# Altium PCB Radar_FMCW.PcbDoc
Units mil, origin at the board's own origin, x right, y up, seen from the top; angles counter-clockwise.
Board outline 4724.41 x 4724.41 mil, 4 copper layers (Top Layer 1, Top Layer, Bottom Layer, Bottom Layer 1), stack 19.964 mil thick; 32 components, 22 nets, 309 pads, 67 vias.
Unrouted connection lines stored in the file: 3.
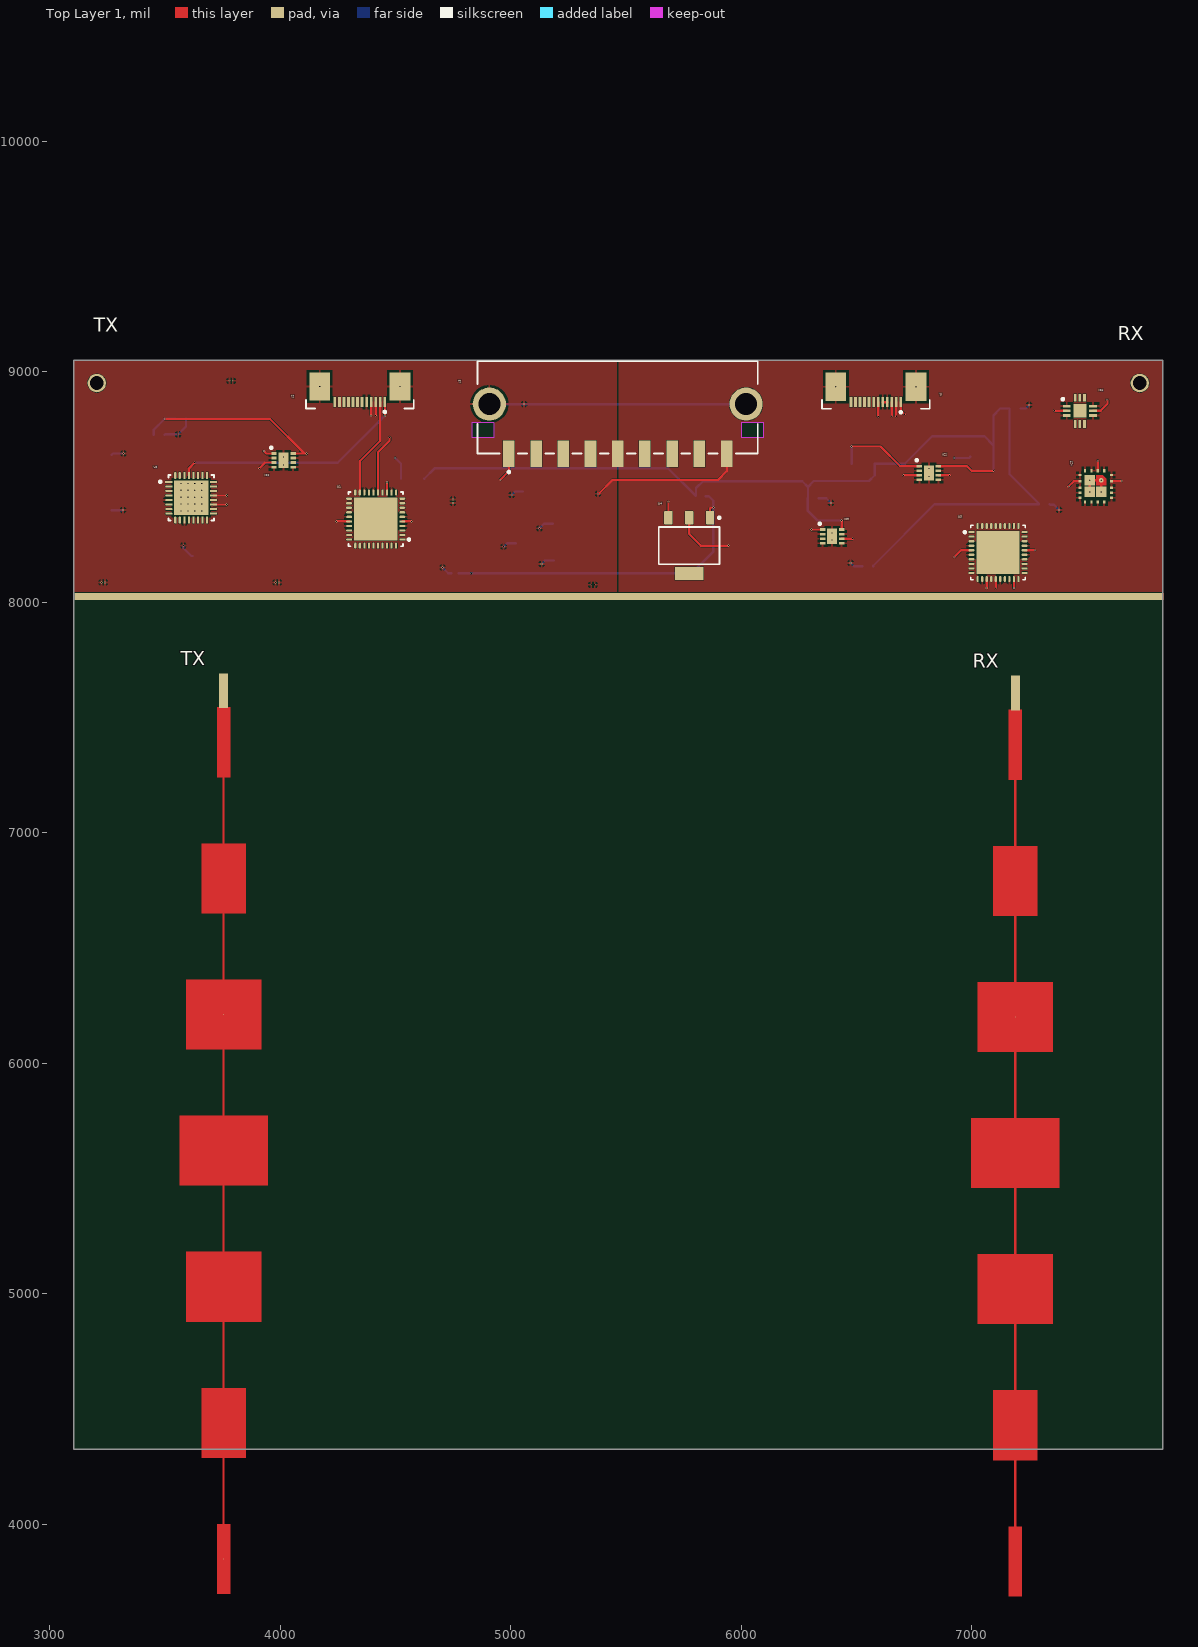
[diagram p0: Top Layer 1 view]
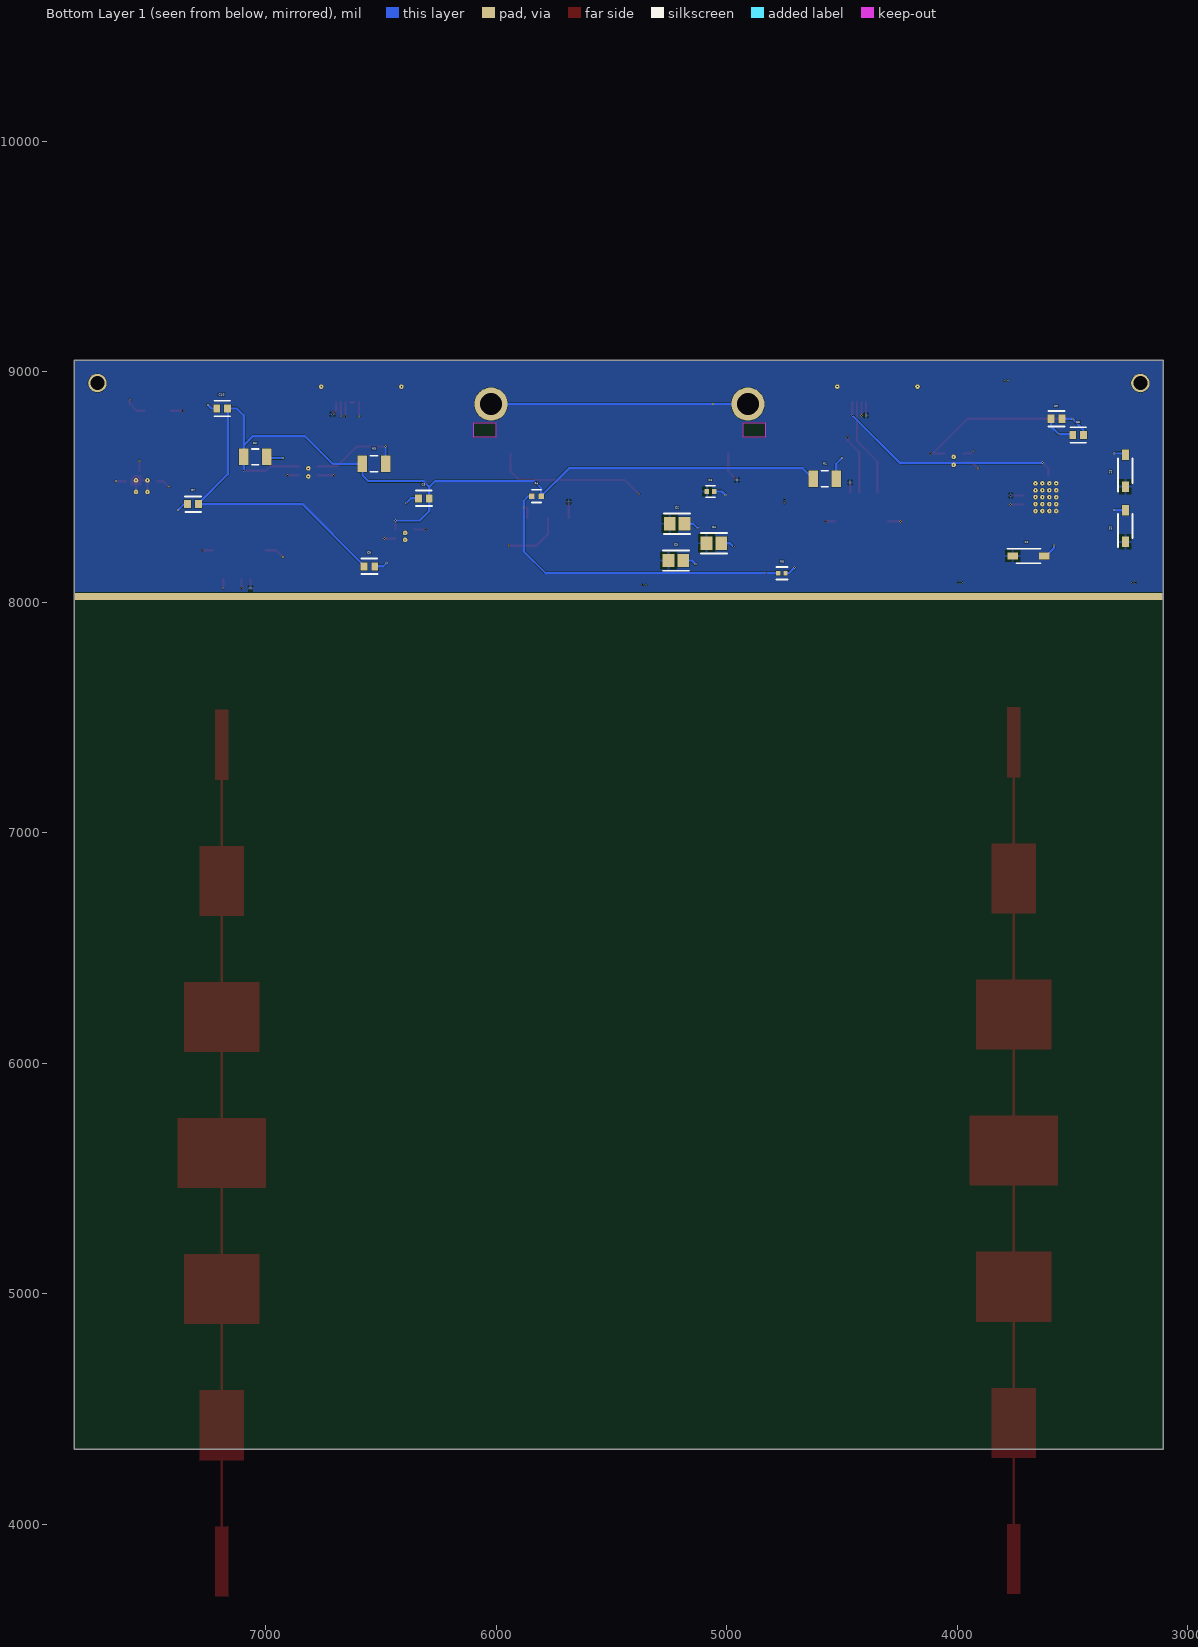
[diagram p1: Bottom Layer 1 view, seen from below]
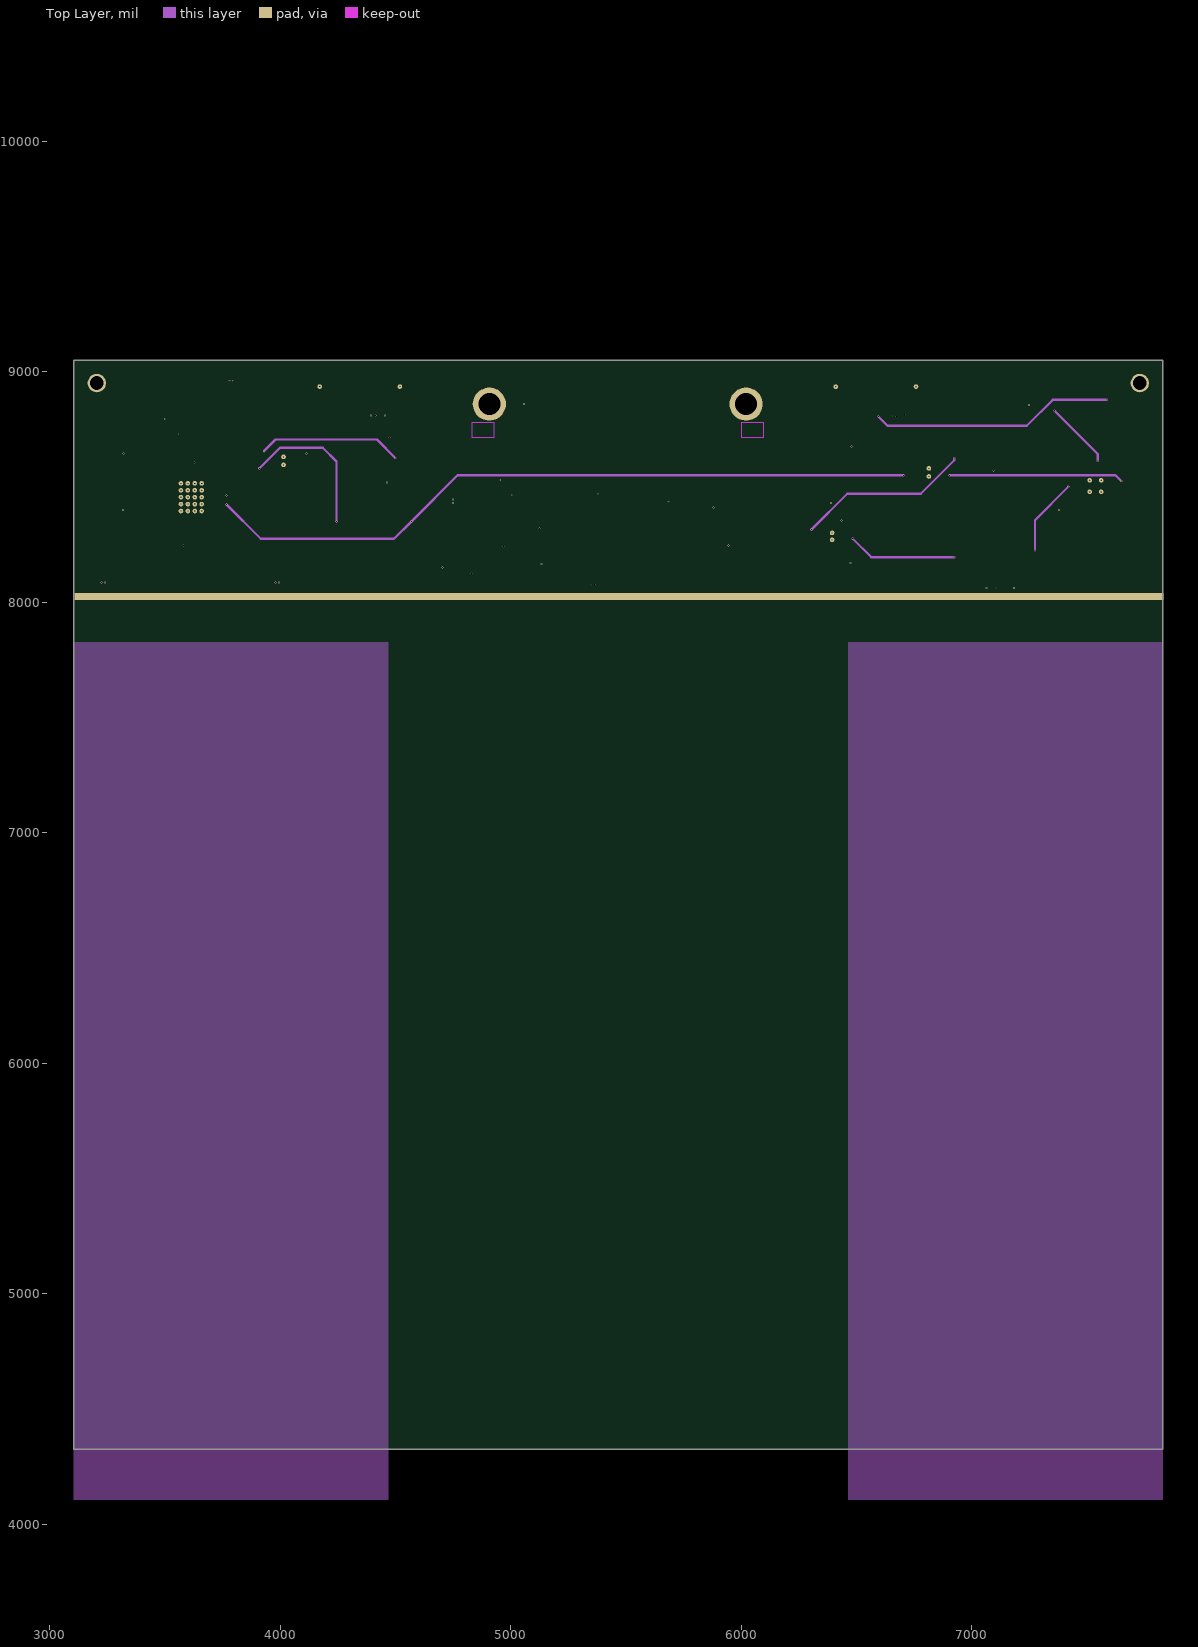
[diagram p2: Top Layer]
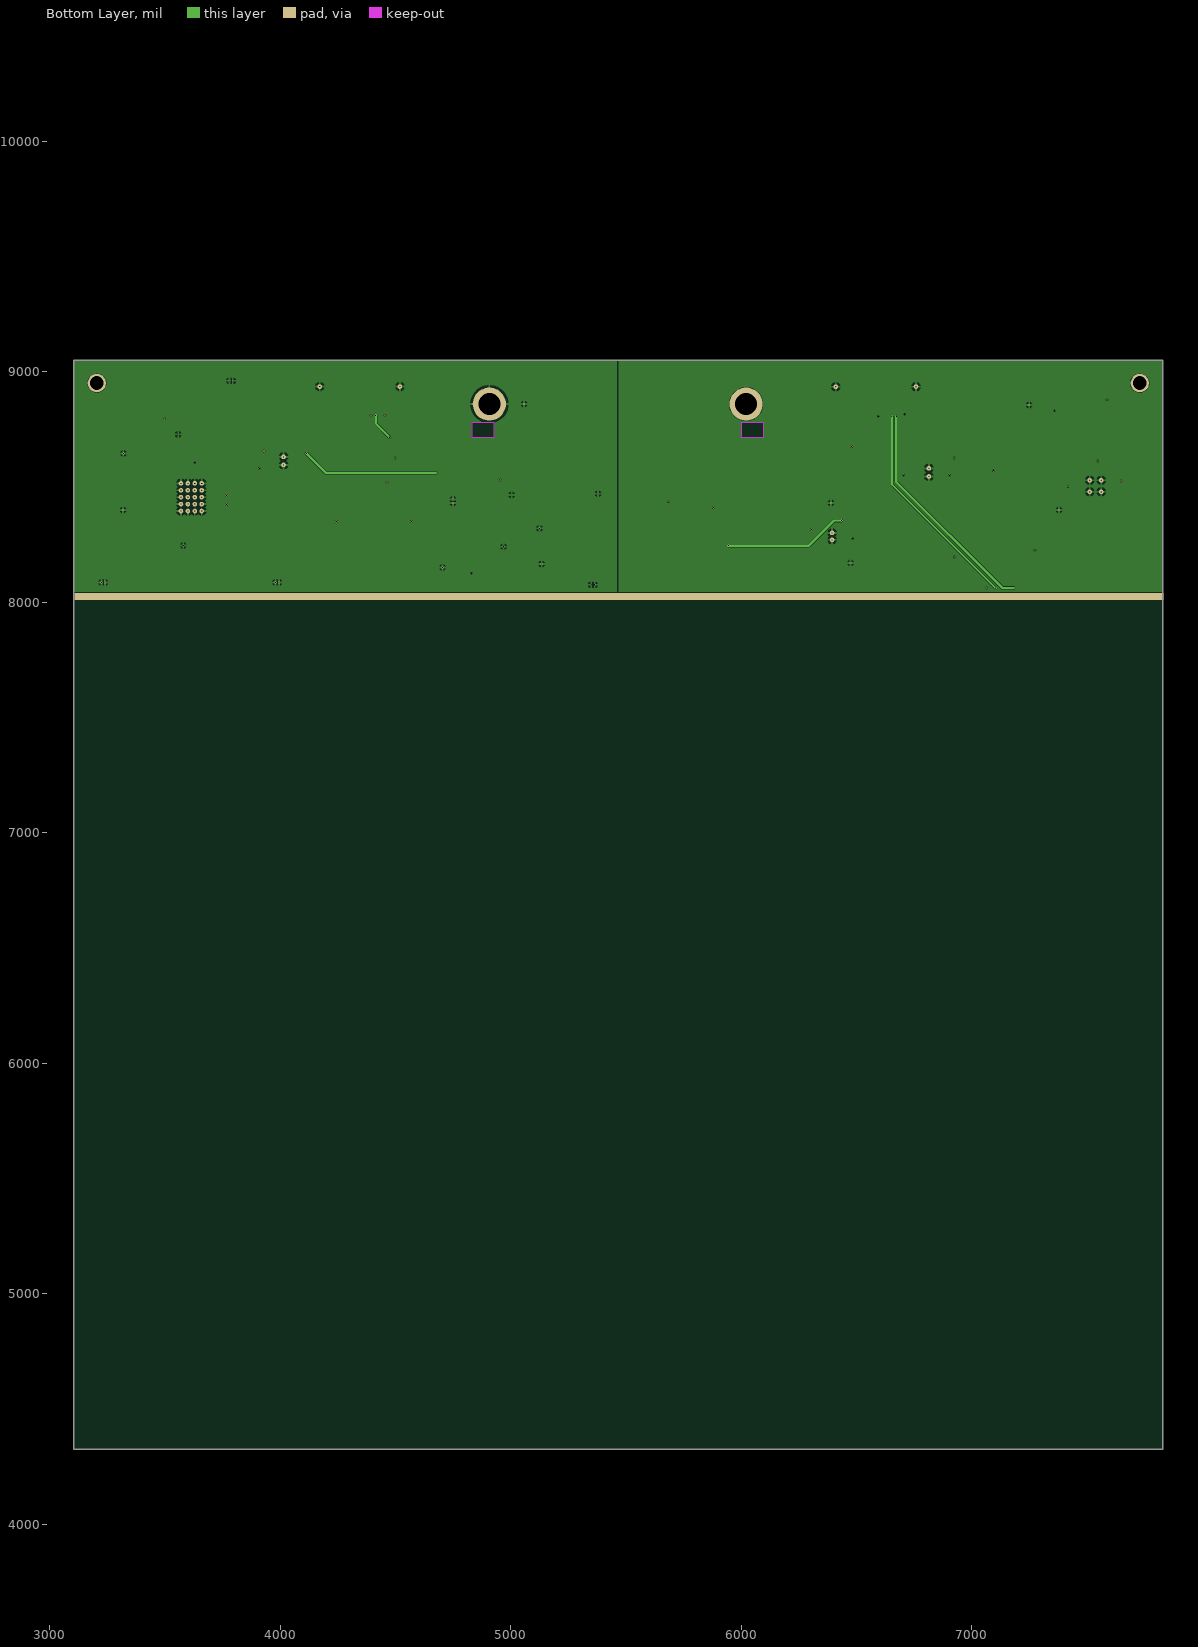
[diagram p3: Bottom Layer]
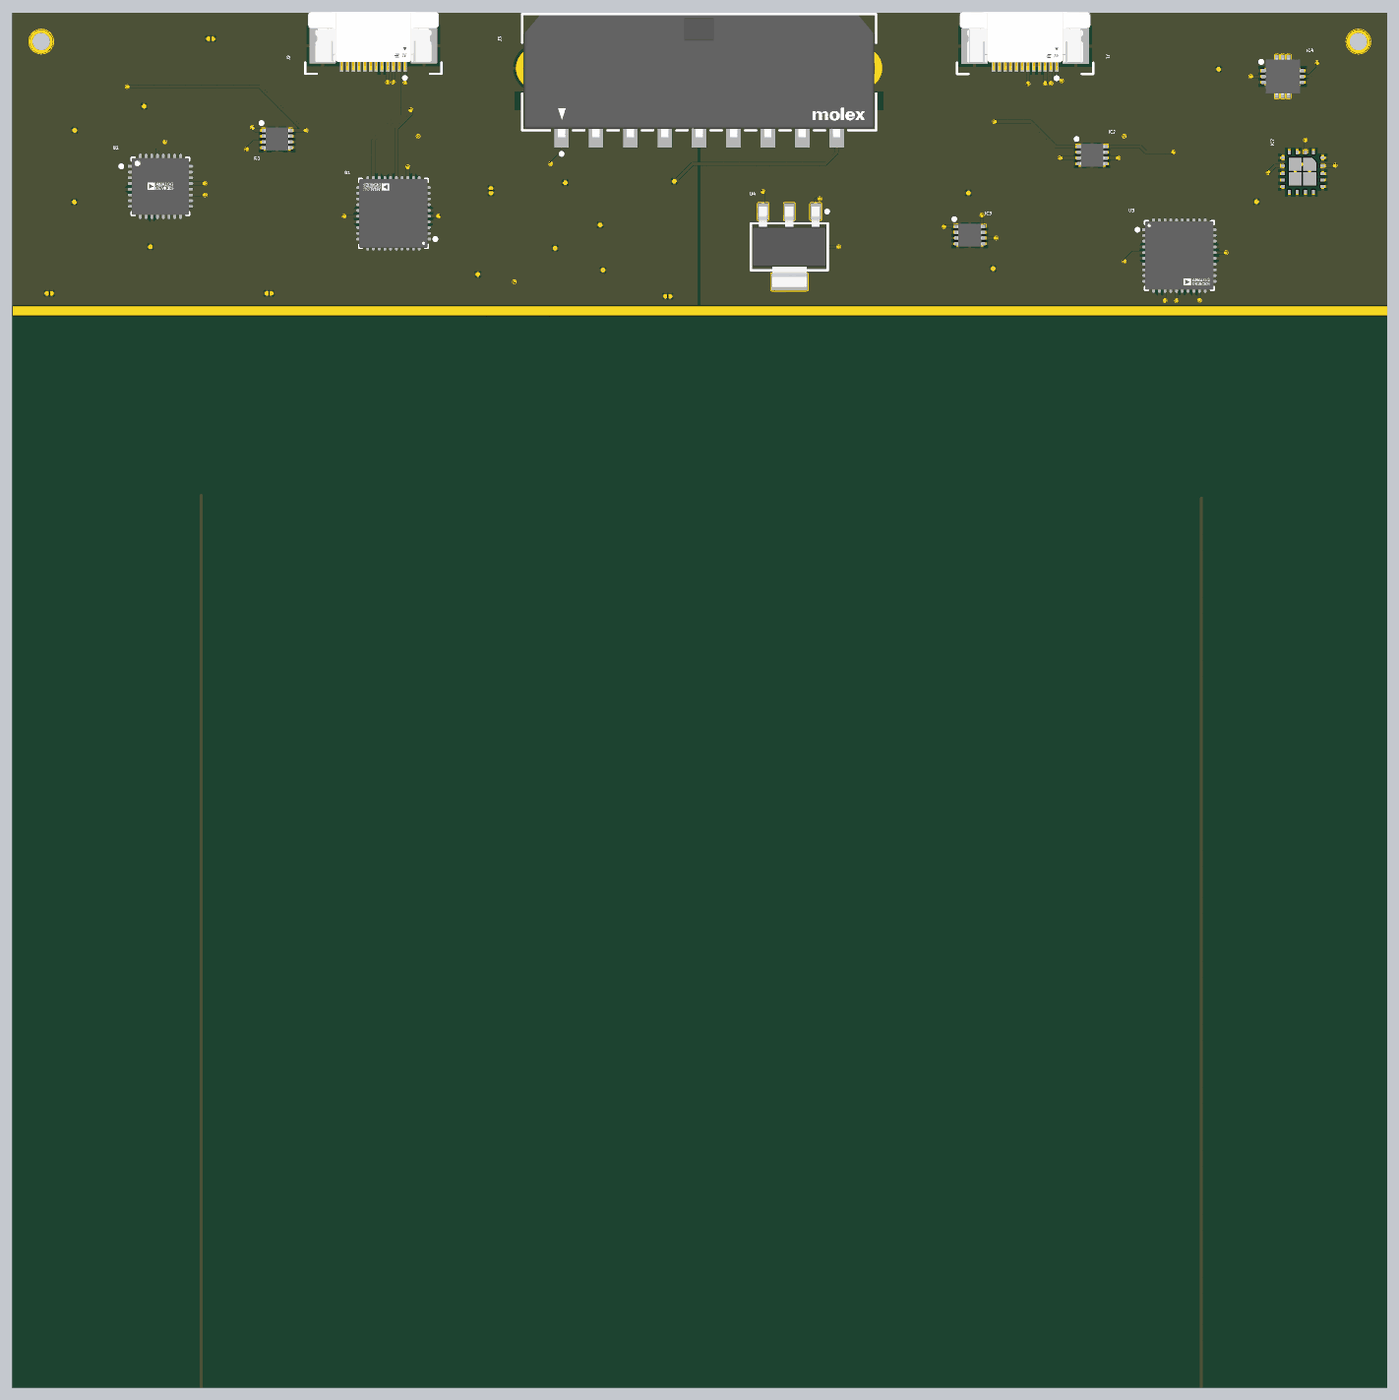
[diagram p4: 3D render of the assembled board from above, using the file's embedded part models]
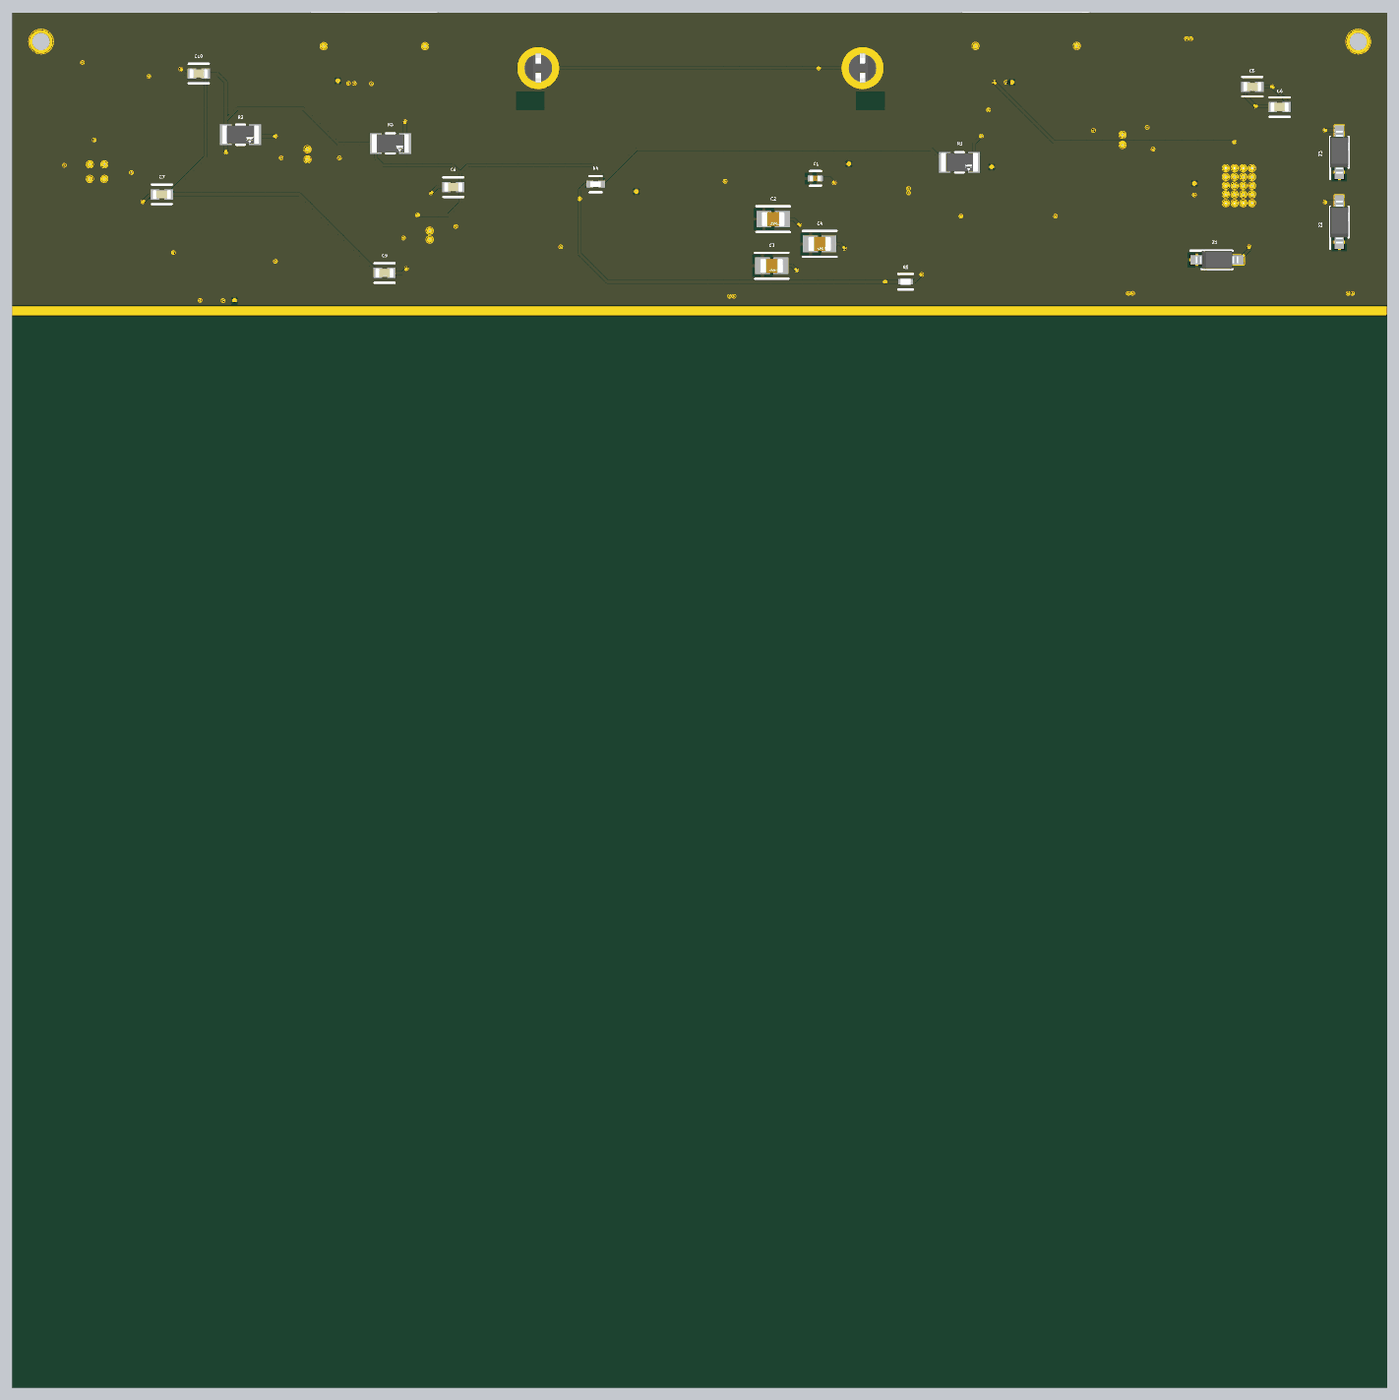
[diagram p5: 3D render of the assembled board from below, using the file's embedded part models]

## Layer stack, top to bottom
Top Solder: solder mask 0.4, Solder Resist, Dk 3.5
Top Layer 1: signal copper 1.378
Dielectric 2: prepreg 2, PP-001, Dk 3.9
Top Layer: signal copper 0.354
Dielectric 1: core 12.5, FR4, Dk 4.3
Bottom Layer: signal copper 0.354
Dielectric 3: prepreg 2, PP-001, Dk 3.9
Bottom Layer 1: signal copper 1.378
Bottom Solder: solder mask 0.4, Solder Resist, Dk 3.5

## Board outline
3105,4325 3105,9049.41 7829.41,9049.41 7829.41,4325

## Design rules (kind name [scope] priority, off if disabled: settings)
Clearance Clearance_3 [All] p1: gap=1 ignorepadtopadclearanceinfootprint=FALSE
Clearance Clearance_1 [All] p2: gap=1 ignorepadtopadclearanceinfootprint=FALSE
Clearance [All] p3: gap=10 ignorepadtopadclearanceinfootprint=FALSE ismatrix=TRUE
PolygonConnect [All] p1: connectstyle=Relief reliefconductorwidth=10 reliefentries=4 polygonreliefangle="90 Angle" airgapwidth=10
RoutingVias [All] p1: holewidth=28 width=50 viastyle="Through Hole" minholewidth=28 minwidth=50 maxholewidth=28 maxwidth=50
SolderMaskExpansion [All] p1: expansion=4 istentingtop=FALSE
Width [All] p1: maxlimit=10 minlimit=10 preferedwidth=10
30 further rules are at their usual default settings.

## Components (designator, comment, footprint, x,y, rotation, side; value= is the part's Value field where it differs from the comment)
C1 "C0402C104K8PACTU" FP-C0402-BB-MFG 5070,8480 r180 bottom value="0.10 μF"
C2 "" FP-0805-L_2_01_0_2-W_1_25-IPC_B 5215,8340 r180 bottom
C3 "" FP-0805-L_2_01_0_2-W_1_25-IPC_B 5220,8180 r180 bottom
C4 "0805ZD225KAT2A" FP-0805-L_2_01_0_2-W_1_25-IPC_B 5055,8255 r180 bottom
C5 "C0603C101J5GACTU" FP-C0603C-CF-MFG 3568.62,8795 r0 bottom value="100 pF"
C6 "C0603C104K5RACTU" FP-C0603C-CF-MFG 3475,8725 r180 bottom value="0.10 μF"
C7 "C0603C104K5RACTU" FP-C0603C-CF-MFG 7315,8425 r180 bottom value="0.10 μF"
C8 "C0603C101J5GACTU" FP-C0603C-CF-MFG 6313.62,8450 r180 bottom value="100 pF"
C9 "C0603C101J5GACTU" FP-C0603C-CF-MFG 6550,8155 r180 bottom value="100 pF"
C10 "C0603C104K5RACTU" FP-C0603C-CF-MFG 7188.62,8840 r180 bottom value="0.10 μF"
IC1 "ADL8143ACPZN" SON50P200X200X90-9N-D 4015,8615 r0 top
IC2 "ADL8143ACPZN" SON50P200X200X90-9N-D 6815,8560 r0 top
IC3 "ADL8143ACPZN" SON50P200X200X90-9N-D 6395,8285 r0 top
IC4 "XLF-732+" QFN51P300X300X89-13N 7470,8830 r0 top
IC7 "Mixer_RF" Mixer_RF 7337.58,8338.24 r0 top
J1 "1-1734839-2" FP-1-1734839-2-MFG 6585,8960 r180 top
J2 "1-1734839-2" FP-1-1734839-2-MFG 4345.98,8960.59 r180 top
J3 "43650-0910" FP-43650-0910-MFG 5465,8845 r180 top
R1 "CRCW1206487RFKEA" FP-CRCW1206-e3-MFG 4575,8535 r180 bottom
R2 "CRCW1206487RFKEA" FP-CRCW1206-e3-MFG 7045,8630 r180 bottom
R3 "CRCW1206487RFKEA" FP-CRCW1206-e3-MFG 6530,8600 r180 bottom
R4 "CRCW0402470RFKED" FP-CRCW0402-e3-MFG 5825,8460 r180 bottom
R5 "CRCW0402100RFKED" FP-CRCW0402-e3-IPC_C 4760,8125 r0 bottom
RX "Component_1" Antenna_10GHz 10000.5,9723.45 r180 top
TX "" Antenna_10GHz 6565.5,9734 r180 top
U1 "ADMV8416ACPZ" FP-CP-40-27-IPC_C 4415,8360 r180 top
U2 "HMC1163LP5E" FP-HCP-32-1-IPC_B 3614.31,8452.53 r0 top
U3 "ADMV8416ACPZ" FP-CP-40-27-IPC_C 7115,8215 r0 top
U4 "LM317EMP/NOPB" DCY0004A_L 5775,8245 r270 top
Z1 "MMSZ4689T1G" SOD3716X135N 3690,8200 r180 bottom
Z2 "MMSZ4689T1G" SOD3716X135N 3270,8330 r90 bottom
Z3 "MMSZ4689T1G" SOD3716X135N 3270,8570 r90 bottom

## Footprints (in the part's own frame and the unit in brackets; to place one, negate y for a bottom-side part, rotate by r counter-clockwise, add the part's x,y. Pads: shape width x height; smd on the part's side, far side on the other; paste and mask are expansions set on the pad)
Antenna_10GHz [mil]
  round 1 smd: 1(2810.5,5885.65) 1(2810.5,2342.35) 1(2810.5,2932.9) 1(2810.5,3523.45) 1(2810.5,4114) 1(2810.5,4704.55) 1(2810.5,5295.1)
  rect 38.43x151.5 smd: 1(2810.5,2118.75)
  Top Layer 1 region: 2782.6,5734.65 2782.6,6036.65 2838.4,6036.65 2838.4,5734.65
  Top Layer 1 region: 2715.25,2781.9 2715.25,3083.9 2905.75,3083.9 2905.75,2781.9
  Top Layer 1 region: 2715.25,5144.1 2715.25,5446.1 2905.75,5446.1 2905.75,5144.1
  Top Layer 1 region: 2647.9,3372.45 2973.1,3372.45 2973.1,3674.45 2647.9,3674.45
  Top Layer 1 region: 2620,3963 2620,4265 3001,4265 3001,3963
  Top Layer 1 region: 2647.9,4553.55 2973.1,4553.55 2973.1,4855.55 2647.9,4855.55
  Top Layer 1 region: 2782.6,2191.35 2782.6,2493.35 2838.4,2493.35 2838.4,2191.35
  Top Layer 1 lines w10: 2810.5,5885.65 2810.5,5295.1 2810.5,4704.55 2810.5,4114 2810.5,3523.45 2810.5,2932.9 2810.5,2342.35
DCY0004A_L [mm] "SOT223, 4-Leads, Body 6.7x3.7mm, Pitch 2.3mm, IPC High Density"
  rrect11% 1.45x0.9 smd: 1(-3.075,2.3) 2(-3.075,0) 3(-3.075,-2.3)
  rrect7% 1.45x3.15 smd: 4(3.075,0)
  silkscreen extent -3.2,-3.35 2.05,3.43, body extent -3.5,-3.25 3.5,3.25, height 1.62
FP-1-1734839-2-MFG [mm]
  rect 0.3x1.1 smd paste+0 mask+0: 1(-2.75,2.35) 2(-2.25,2.35) 3(-1.75,2.35) 4(-1.25,2.35) 5(-0.75,2.35) 6(-0.25,2.35) 7(0.25,2.35) 8(0.75,2.35) 9(1.25,2.35) 10(1.75,2.35) 11(2.25,2.35) 12(2.75,2.35)
  rect 2.3x3.1 smd paste+0 mask+0: 13(-4.42,0.65) 14(4.42,0.65)
  silkscreen extent -5.94,2.1 5.94,3.57, body extent -5.86,-2.35 5.86,3, height 0.25
FP-0805-L_2_01_0_2-W_1_25-IPC_B [mil]
  rect 51.36x57.33 smd paste+0 mask+0: 1(-31.72,0) 2(31.72,0)
  silkscreen extent -57,-44 57,44, body extent -40,-25 40,25, height 55
FP-43650-0910-MFG [mm]
  rect 1.27x2.92 smd paste+0 mask+0: 1(12,5.12) 2(9,5.12) 3(6,5.12) 4(3,5.12) 5(0,5.12) 6(-3,5.12) 7(-6,5.12) 8(-9,5.12) 9(-12,5.12)
  round 3.66 hole 2.41 paste-2539.97 mask+0: 10(-14.15,-0.35) 11(14.15,-0.35)
  Keep-Out Layer region: -16.065,1.7 -13.615,1.7 -13.615,3.3 -16.065,3.3
  Keep-Out Layer region: 13.615,1.7 16.065,1.7 16.065,3.3 13.615,3.3
  silkscreen extent -15.44,-5.07 15.44,7.25, body extent -16.08,-5.18 16.08,6.68, height 0.25
FP-C0402-BB-MFG [mm]
  rect 0.52x0.52 smd paste+0 mask+0: 1(-0.4,0) 2(0.4,0)
  silkscreen extent -0.5,-0.64 0.5,0.64, body extent -0.5,-0.25 0.5,0.25, height 0.55
FP-C0603C-CF-MFG [mm]
  rect 0.75x0.9 smd paste+0 mask+0: 1(-0.6,0) 2(0.6,0)
  silkscreen extent -0.87,-0.85 0.88,0.85, body extent -0.8,-0.4 0.8,0.4, height 0.87
FP-CP-40-27-IPC_C [mm]
  rect 0.661x0.242 smd paste+0 mask+0: 1(-2.926,2.25)
  rrect100% 0.661x0.242 smd paste+0 mask+0: 2(-2.926,1.75) 3(-2.926,1.25) 4(-2.926,0.75) 5(-2.926,0.25) 6(-2.926,-0.25) 7(-2.926,-0.75) 8(-2.926,-1.25) 9(-2.926,-1.75) 10(-2.926,-2.25) 21(2.926,-2.25) 22(2.926,-1.75) 23(2.926,-1.25) 24(2.926,-0.75) 25(2.926,-0.25) 26(2.926,0.25) 27(2.926,0.75) 28(2.926,1.25) 29(2.926,1.75) 30(2.926,2.25)
  rrect100% 0.242x0.661 smd paste+0 mask+0: 11(-2.25,-2.926) 12(-1.75,-2.926) 13(-1.25,-2.926) 14(-0.75,-2.926) 15(-0.25,-2.926) 16(0.25,-2.926) 17(0.75,-2.926) 18(1.25,-2.926) 19(1.75,-2.926) 20(2.25,-2.926) 31(2.25,2.926) 32(1.75,2.926) 33(1.25,2.926) 34(0.75,2.926) 35(0.25,2.926) 36(-0.25,2.926) 37(-0.75,2.926) 38(-1.25,2.926) 39(-1.75,2.926) 40(-2.25,2.926)
  rect 4.75x4.75 smd paste-1000 mask+0: 41(0,0)
  silkscreen extent -3.78,-3 3,3, body extent -3.36,-3.36 3.36,3.36, height 0.25
FP-CRCW0402-e3-IPC_C [mil]
  rect 18.43x18.6 smd paste+0 mask+0: 1(-15.83,0) 2(15.83,0)
  silkscreen extent -25,-27 25,27, body extent -20,-10 20,10, height 16
FP-CRCW0402-e3-MFG [mm]
  rect 0.6x0.6 smd paste+0 mask+0: 1(-0.525,0) 2(0.525,0)
  silkscreen extent -0.53,-0.7 0.53,0.7, body extent -0.5,-0.25 0.5,0.25, height 0.4
FP-CRCW1206-e3-MFG [mm]
  rect 1.05x1.8 smd paste+0 mask+0: 1(-1.275,0) 2(1.275,0)
  silkscreen extent -0.38,-0.87 0.38,0.87, body extent -1.6,-0.8 1.6,0.8, height 0.6
FP-HCP-32-1-IPC_B [mm]
  rect 0.806x0.239 smd paste+0 mask+0: 1(-2.453,1.75)
  rrect100% 0.806x0.239 smd paste+0 mask+0: 2(-2.453,1.25) 3(-2.453,0.75) 4(-2.453,0.25) 5(-2.453,-0.25) 6(-2.453,-0.75) 7(-2.453,-1.25) 8(-2.453,-1.75) 17(2.453,-1.75) 18(2.453,-1.25) 19(2.453,-0.75) 20(2.453,-0.25) 21(2.453,0.25) 22(2.453,0.75) 23(2.453,1.25) 24(2.453,1.75)
  rrect100% 0.239x0.806 smd paste+0 mask+0: 9(-1.75,-2.453) 10(-1.25,-2.453) 11(-0.75,-2.453) 12(-0.25,-2.453) 13(0.25,-2.453) 14(0.75,-2.453) 15(1.25,-2.453) 16(1.75,-2.453) 25(1.75,2.453) 26(1.25,2.453) 27(0.75,2.453) 28(0.25,2.453) 29(-0.25,2.453) 30(-0.75,2.453) 31(-1.25,2.453) 32(-1.75,2.453)
  rect 3.8x3.8 smd paste-1000 mask+0: 33(0,0)
  silkscreen extent -3.53,-2.5 2.5,2.5, body extent -3.11,-3.11 3.11,3.11, height 0.25
Mixer_RF [mm]
  rect 0.35x0.25 smd: 1(3.385,4.709) 2(6.837,4.709) GND(3.385,2.909) GND(3.385,3.459) GND(3.385,4.009) GND(3.385,5.409) GND(6.837,2.909) GND(6.837,3.459) GND(6.837,4.009) GND(6.837,5.409)
  rect 0.25x0.35 smd: 3(5.338,5.876) GND(3.937,2.434) GND(3.937,5.876) GND(4.638,2.434) GND(4.638,5.876) GND(5.338,2.434) GND(6.038,2.434) GND(6.038,5.876)
  rect 1.136x1.136 smd: GND(4.445,3.556) GND(4.445,4.826) GND(5.715,3.556)
  round 0.025 smd: GND(5.715,4.826)
  Top Layer 1 region: 5.147,4.258 5.147,5.394 5.909,5.394 6.283,5.02 6.283,4.258
QFN51P300X300X89-13N [mm]
  rect 0.85x0.3 smd: 1(-1.45,0.51) 2(-1.45,0) 3(-1.45,-0.51) 7(1.45,-0.51) 8(1.45,0) 9(1.45,0.51)
  rect 0.3x0.85 smd: 4(-0.51,-1.45) 5(0,-1.45) 6(0.51,-1.45) 10(0.51,1.45) 11(0,1.45) 12(-0.51,1.45)
  rect 1.45x1.45 smd: 13(0,0)
  silkscreen extent -2,1.15 -1.75,1.4, body extent -1.55,-1.55 1.55,1.55, height 0.89
SOD3716X135N [mm]
  rect 1.15x0.8 smd: 1(-1.75,0) 2(1.75,0)
  silkscreen extent -2.32,-0.8 1.35,0.8, body extent -1.86,-0.8 1.86,0.8, height 1.35
SON50P200X200X90-9N-D [mm]
  rect 0.6x0.3 smd: 1(-1.05,0.75) 2(-1.05,0.25) 3(-1.05,-0.25) 4(-1.05,-0.75) 5(1.05,-0.75) 6(1.05,-0.25) 7(1.05,0.25) 8(1.05,0.75)
  rect 1.1x1.7 smd: 9(0,0)
  silkscreen extent -1.47,1.28 -1.22,1.52, body extent -1.05,-1 1.05,1, height 0.9

## Part data
C1: library part CMP-2008-02046-2, "CAP CER 0.1UF 10V X5R 0402", Capacitance="0.10 μF", Manufacturer=Kemet, Package=C0402-BB, Temperature="-55°C to +125°C", Temperature Characteristic=X5R, Temperature Coefficient=15%, Temperature Range High=+125°C, Temperature Range Low=-55°C, Tolerance=0.1, Voltage Rating="10 V", Automotive=No, Category=Cap, ComponentLink2Description=Datasheet, ComponentLink2URL=https://content.kemet.com/datasheets/KEM_C1002_X7R_SMD.pdf, Device Class L1="Passive Components", Device Class L2=Capacitors, Device Class L3="Ceramic Capacitors", Digikey Description="CAP CER 0.1UF 10V X5R 0402", Height=0.55mm, Ipc Land Pattern Name=CAPC10050X50, Lead Free=Yes, Manufacturer Part Number=C0402C104K8PACTU, Material=Ceramic, Mouser Description="Capacitor 100 nF 10 VDC 0402", Octopart=https://octopart.com/c0402c104k8pactu-kemet-140039, RoHS=TRUE
C2 C3 C4: library part CMP-2000-05810-2, "General Purpose Ceramic Capacitor, 0805, 2.2uF, 10%, X5R, 15%, 10V", Capacitance=2.2uF, Case Code (Imperial)=0805, Case Code (Metric)=2012, Dielectric=X5R, Dielectric Material=Ceramic, Insulation Resistance=500MR, Max Operating Temperature=85°C, Min Operating Temperature=-55°C, Package Quantity=1, Tolerance=10%, Voltage=10V, Case/Package=0805, Construction=Flat, Contact Plating=Tin, Depth=1.25mm, Dissipation Factor=5%, Height=1.4mm, Lead Free="Lead Free", Length=2.01mm, Mount="Surface Mount", Number of Pins=2, Packaging="Tape and Reel", Radiation Hardening=No, REACH SVHC="No SVHC", RoHS Compliant=Yes, Series=-, Size=1.4mm, Termination=SMD/SMT, Thickness=0.055inch, Voltage Rating=10V, Voltage Rating (DC)=10V, Width=0.049inch
C5 C8 C9: library part CMP-2006-03408-2, "CAP CER 100PF 50V C0G/NP0 0603", Capacitance="100 pF", Manufacturer=KEMET, Package=C0603C-CF, Temperature="-55°C to +125°C", Temperature Characteristic=C0G, Temperature Coefficient=30ppm/°C, Temperature Range High=+125°C, Temperature Range Low=-55°C, Tolerance=0.05, Voltage Rating="50 V", Automotive=Yes, Automotive Grade="Grade 1", Category=Cap, ComponentLink2Description=Datasheet, ComponentLink2URL=https://api.kemet.com/component-edge/download/datasheet/C0603C100J5GACAUTO.pdf, Device Class L1="Passive Components", Device Class L2=Capacitors, Device Class L3="Ceramic Capacitors", Digikey Description="CAP CER 100PF 50V C0G/NP0 0603", Height=0.87mm, Lead Free=Yes, Manufacturer Part Number=C0603C101J5GACTU, Material=Ceramic, Mouser Description="Multilayer Ceramic Capacitor, C Series, 100 Pf, - 5%, C0g / Np0, 50 V, 0603 [1608 Metric] Rohs Compliant: Yes", Octopart=https://octopart.com/c0603c101j5gactu-kemet-100052, RoHS=TRUE
C6 C7 C10: library part CMP-2006-03061-2, "CAP CER 0.1UF 50V X7R 0603", Capacitance="0.10 μF", Manufacturer=KEMET, Package=C0603C-CF, Temperature="-55°C to +125°C", Temperature Characteristic=X7R, Temperature Coefficient=30ppm/°C, Temperature Range High=+125°C, Temperature Range Low=-55°C, Tolerance=0.1, Voltage Rating="50 V", Automotive=Yes, Automotive Grade="Grade 1", Category=Cap, ComponentLink2Description=Datasheet, ComponentLink2URL=https://api.kemet.com/component-edge/download/datasheet/C0603C100J5GACAUTO.pdf, Device Class L1="Passive Components", Device Class L2=Capacitors, Device Class L3="Ceramic Capacitors", Digikey Description="CAP CER 0.1UF 50V X7R 0603", Height=0.87mm, Lead Free=Yes, Manufacturer Part Number=C0603C104K5RACTU, Material=Ceramic, Octopart=https://octopart.com/c0603c104k5ractu-kemet-139244, RoHS=TRUE
IC1 IC2 IC3: "Integrated Circuit", Manufacturer_Name="Analog Devices", Datasheet Link=https://www.analog.com/ADL8143/datasheet, Height=0.9mm, Manufacturer_Part_Number=ADL8143ACPZN
IC4: "Integrated Circuit", Manufacturer_Name=Mini-Circuits, Mouser Part Number=139-XLF-732, Datasheet Link=https://www.minicircuits.com/WebStore/dashboardPdf?model=XLF-732%2B, Height=0.89mm, Manufacturer_Part_Number=XLF-732+, Mouser Price/Stock=https://www.mouser.co.uk/ProductDetail/Mini-Circuits/XLF-732%2b?qs=xZ%2FP%252Ba9zWqZ1H%2Fab09yzWw%3D%3D
J1 J2: library part CMP-03368-000004-1, "CONN FPC TOP 12POS 0.50MM R/A", Actuator Color=Beige, Contact Current Rating=500mA, Flammability Rating="UL94 V-0", Housing Color=Natural, Max Operating Temperature=85°C, Min Operating Temperature=-40°C, Package Quantity=2000, Voltage Rating=250V, Actuator Material=Thermoplastic, Connector System=Flex-to-Board, Connector Type=Receptacle, Contact Location=Top, Contact Material=Bronze, Contact Plating=Gold, Current Rating=500mA, Depth=5.1mm, Gender=Receptacle, Height=2.05mm, Housing Material=Polymer, Length=11.43mm, Mating Alignment="Yes (With)", Mount="Surface Mount", Number of Contacts=12, Number of Positions=12, Number of Rows=1, Orientation="Right Angle", Packaging="Tape and Reel", PCB Mount Alignment="No (Without)", PCB Mount Retention=With, PCB Mounting Orientation="Right Angle", Pitch=0.5mm, Radiation Hardening=No, RoHS Compliant=Yes, Sealable="No (Without)", Series=-, Shielding=Unshielded, Shrouded="Yes (With)", Termination=SMD/SMT, Width=5.1mm, Wire/Cable Type="Flat Flex"
J3: library part CMP-00257-00277514-1, "43650-0910 Conn Power HDR 9 POS 3mm Solder RA SMD 9 Terminal 1 Port Micro-Fit 3.0™ Embossed T/R", Color=Black, Current Rating=5A, Flammability Rating="UL94 V-0", Manufacturer Lifecycle Status=ACTIVE, Max Operating Temperature=105°C, Max Voltage Rating (AC)=250V, Min Operating Temperature=-40°C, Connector Type="Male Pin", Contact Material=Brass, Contact Plating=Gold, Country of Origin=US, Fastening Type=Ramp, Gender=Male, Glow Wire Compliant=Compliant, Halogen Free="Low Halogen", Housing Color=Black, Housing Material=Thermoplastic, Lead Free="Contains Lead", Lead Pitch=3mm, Lifecycle Status=Production, Mount="Surface Mount", NexarPartId=277514, Number of Circuits=9, Number of Contacts=9, Number of Positions=9, Number of Rows=1, Orientation="Right Angle", Pitch=3mm, Plating=Tin, RoHS=Compliant, Termination=Solder, Voltage Rating=250V, Voltage Rating (DC)=250V
R1 R2 R3: library part CMP-2003-02220-2, "RES Thick Film, 487Ω, 1%, 0.25W, 100ppm/°C, 1206", Case Code (Imperial)=1206, Case Code (Metric)=3216, Max Operating Temperature=155°C, Max Power Dissipation=250mW, Min Operating Temperature=-55°C, Package Quantity=10, Resistance=487R, Temperature Coefficient=100ppm/°C, Tolerance=1%, Voltage Rating=200V, Case/Package=1206, Composition="Thick Film", Contact Plating=Tin, Depth=1.6mm, Features="Automotive AEC-Q200", Height=0.024inch, Lead Free="Lead Free", Length=3.2mm, Military Standard=Not, Number of Pins=2, Number of Terminations=2, Packaging="Tape and Reel", Power Rating=250mW, Radiation Hardening=No, Termination=SMD/SMT, Voltage Rating (DC)=200V, Weight=0.000353oz, Width=0.063inch
R4: library part CMP-2002-00022-2, "RES Thick Film, 470Ω, 1%, 0.063W, 100ppm/°C, 0402", Case Code (Imperial)=0402, Case Code (Metric)=1005, Max Operating Temperature=155°C, Max Power Dissipation=63mW, Min Operating Temperature=-55°C, Package Quantity=10, Resistance=470R, Temperature Coefficient=100ppm/°C, Tolerance=1%, Voltage Rating=50V, Case/Package=0402, Composition="Thick Film", Contact Plating=Tin, Depth=0.5mm, Features="Automotive AEC-Q200", Height=0.35mm, Lead Free="Lead Free", Length=1mm, Military Standard=Not, Mount="Surface Mount", Number of Terminations=2, Packaging="Tape and Reel", Power Rating=63mW, Radiation Hardening=No, Termination=SMD/SMT, Voltage Rating (DC)=50V, Weight=2.3E-05oz, Width=0.5mm
R5: library part CMP-1011-00397-3, "RES Thick Film, 100Ω, 1%, 0.063W, 100ppm/°C, 0402", Case Code (Imperial)=0402, Case Code (Metric)=1005, Max Operating Temperature=155°C, Max Power Dissipation=63mW, Min Operating Temperature=-55°C, Package Quantity=10, Resistance=100R, Temperature Coefficient=100ppm/°C, Tolerance=1%, Voltage Rating=50V, Case/Package=0402, Composition="Thick Film", Contact Plating=Tin, Depth=0.5mm, Features="Automotive AEC-Q200", Height=0.35mm, Lead Free="Lead Free", Length=1mm, Military Standard=Not, Mount="Surface Mount", Number of Terminations=2, Packaging="Tape and Reel", Power Rating=63mW, Radiation Hardening=No, Termination=SMD/SMT, Voltage Rating (DC)=50V, Weight=2.3E-05oz, Width=0.02inch, Working Voltage=50V
TX: library part Component_1
U1 U3: library part CMP-09093-000060-1, "8 TO 16 GHZ TUNABLE BPF", RoHS Compliant=Yes
U2: library part CMP-09142-000244-1, "IC VCO VSAT 9.65-10.41GHZ 32CSP", Frequency=10.41GHz, Operating Supply Current=230mA, Gain=11dB, Lead Free="Contains Lead", Number of Pins=32, P1dB=11dBm, Packaging=Strip, RoHS Compliant=Yes, Series=-
U4: library part CMP-0062-01707-3, "3-Terminal Adjustable Regulator, 4-pin SOT-223, Pb-Free", Manufacturer="Texas Instruments", PackageTopMarking=XYTT*N01A, PowerWise=N, Code_IPC=SOT223-4, Code_JEDEC=TO-261-AA, ComponentLink1Description="Datasheet URL", ComponentLink1URL=http://www.ti.com/general/docs/lit/getliterature.tsp?genericPartNumber=LM317-N&fileType=pdf, CompType="LDO IC", PackageDescription="Molded SOT-223, 6.50 x 3.56 x 1.6mm Body, 4 Lead, 2.3mm Pitch", PackageReference=DCY0004A, PinCount=4, RoHS=Y
Z1 Z2 Z3: "Zener Diode", Manufacturer_Name=onsemi, Mouser Part Number=863-MMSZ4689T1G, Arrow Part Number=MMSZ4689T1G, Arrow Price/Stock=https://www.arrow.com/en/products/mmsz4689t1g/on-semiconductor?region=nac, Datasheet Link=http://www.onsemi.com/pub/Collateral/MMSZ4678T1-D.PDF, Height=1.35mm, Manufacturer_Part_Number=MMSZ4689T1G, Mouser Price/Stock=https://www.mouser.co.uk/ProductDetail/onsemi/MMSZ4689T1G?qs=P4IOph%252Bbot%252Blaz%2FZtdyBaA%3D%3D

## Free pads (board coordinates)
  round 20 hole 5: 2(3570,8395) 2(3570,8425) 2(3570,8455) 2(3570,8485) 2(3570,8515) 2(3600,8395) 2(3600,8425) 2(3600,8455) 2(3600,8485) 2(3600,8515) 2(3630,8395) 2(3630,8425) 2(3630,8455) 2(3630,8485) 2(3630,8515) 2(3660,8395) 2(3660,8425) 2(3660,8455) 2(3660,8485) 2(3660,8515) 2(4015,8595) 2(4015,8630) 2(4171.97,8935) 2(4520,8935) 2(6395,8270) 2(6395,8300) 2(6410.98,8934.41) 2(6759.02,8934.41) 2(6815,8545) 2(6815,8580) 2(7512.58,8478.24) 2(7512.58,8528.24) 2(7562.58,8478.24) 2(7562.58,8528.24)
  rect 4725x30 all layers, no hole: 3(5470,8025)
  round 80 hole 60: (3205,8950) (7730,8950)

## Via types
v1: diameter 8, hole 3, Top Layer 1 to Bottom Layer 1, 67 vias

## Nets (pads, with @x,y where several pads share a name; then routed paths per layer and width w, separated by ;. In a path a pad name is that pad's centre, name@x,y a point inside that pad or via, vN(x,y) a via of type N, cw(c..) or ccw(c..) an arc to the next point about the centre after c; other vN are vias at no path point)
+5: C1.1 C2.1 C3.1 C4.1 J1.1 J2.4 J3.1 U1.13 U2.21 U3.13 U4.3 Z1.1 Z2.1 Z3.1 | length 455.8
  Top Layer 1 w10: U2.21 v1(3767.37,8462.37) ; v1(4395,8810) 4395.2,8810.2 J2.4 ; U1.13 v1(4464.21,8519.21) ; v1(4955,8530) 4992.56,8567.56 J3.1 ; U4.3 5685,8366.61 v1(5685,8435) ; J1.1 6693.27,8831.73 v1(6710,8815) ; v1(7065.41,8060.41) 7065.79,8060.79 U3.13
GND_RX_RF: C7.1 C8.1 C9.2 C10.1 IC2.2 IC2.4 IC2.5 IC2.7 IC2.9 IC3.2 IC3.4 IC3.5 IC3.7 IC3.9 IC4.1 IC4.3 IC4.7 IC4.9 IC7.GND J1.4 J1.5 J1.13 J1.14 pad.2@6395,8270 pad.2@6395,8300 pad.2@6410.98,8934.41 pad.2@6759.02,8934.41 pad.2@6815,8545 pad.2@6815,8580 pad.2@7512.58,8478.24 pad.2@7512.58,8528.24 pad.2@7562.58,8478.24 pad.2@7562.58,8528.24 U3.4 U3.6 U3.12 U3.16 U3.18 U3.25 U3.27 | length 384
  Top Layer 1 w10: J1.5 J1.4 ; IC7.GND@7512.58,8478.24 7512.58,8528.24 7562.58,8528.24 IC7.GND@7562.58,8478.24
  Bottom Layer 1 w10: C8.1 6370,8450 v1(6390,8430) ; v1(6475,8170) 6490,8155 C9.2 ; C10.1 7235,8840 v1(7250,8855) ; C7.1 7341.57,8422.05 7357.95,8422.05 v1(7380,8400)
GND_TX_RF: C1.2 C2.2 C3.2 C4.2 C5.2 C6.1 IC1.2 IC1.4 IC1.5 IC1.7 IC1.9 J2.5 J2.13 J2.14 J3.9 J3.10 J3.11 pad.2@3570,8395 pad.2@3570,8425 pad.2@3570,8455 pad.2@3570,8485 pad.2@3570,8515 pad.2@3600,8395 pad.2@3600,8425 pad.2@3600,8455 pad.2@3600,8485 pad.2@3600,8515 pad.2@3630,8395 pad.2@3630,8425 pad.2@3630,8455 pad.2@3630,8485 pad.2@3630,8515 pad.2@3660,8395 pad.2@3660,8425 pad.2@3660,8455 pad.2@3660,8485 pad.2@3660,8515 pad.2@4015,8595 pad.2@4015,8630 pad.2@4171.97,8935 pad.2@4520,8935 R5.1 U1.4 U1.6 U1.12 U1.16 U1.18 U1.25 U1.27 U2.5 U2.11 U2.33 Z1.2 Z2.2 Z3.2 | length 2387.8
  Top Layer 1 w10: v1(5380,8470) 5382.54,8470 5442.54,8530 5900,8530 5937.44,8567.44 J3.9
  Bottom Layer 1 w10: Z2.2 v1(3318.9,8398.9) ; Z3.2 3276.1,8645 v1(3320,8645) ; C6.1 3501.57,8727.95 v1(3557.95,8727.95) 3592.24,8762.24 C5.2 ; v1(3580,8245) 3580,8234.21 3614.21,8200 Z1.2 ; v1(4705,8150) 4730,8125 R5.1 ; J3.11 v1(5058.78,8858.78) J3.10 ; v1(4970,8240) 4985,8255 C4.2 ; v1(5005,8465) 5020,8480 C1.2 ; v1(5125,8320) 5145,8340 C2.2 ; v1(5135,8165) 5150,8180 C3.2
  other v1: 5350,8075 5365,8075 3225,8085 3240,8085 3980.23,8085.25 3995.23,8085.25 4750,8430 4750,8445 3780,8960 3795,8960
IF_OUT: IC4.8 J1.6 | length 1212.8
  Top Layer 1 w10: J1.6 6594.84,8805.16 v1@6595,8805 ; IC4.8 7560,8830 7590,8860 7590,8875.84 v1(7587.92,8877.92)
  Top Layer w10: v1(6595.23,8805.25) 6635.48,8765 7240,8765 7352.92,8877.92 v1(7587.92,8877.92)
NetIC1_1: IC1.1 R1.2 | length 772.1
  Top Layer 1 w10: v1(3930,8655) 3940.47,8644.53 IC1.1
  Top Layer w10: v1(3930,8655) 3980,8705 4420,8705 v1(4500,8625)
  Bottom Layer 1 w10: v1(4500,8625) 4524.8,8600.2 R1.2
NetIC1_3: IC1.3 U1.26 | length 786.1
  Top Layer 1 w10: v1(3910,8580) 3935.16,8605.16 IC1.3 ; v1(4245,8350) 4299.66,8350 U1.26
  Top Layer w10: v1(3910,8580) 4000,8670 4185,8670 4245,8610 v1(4245,8350)
NetIC1_6: IC1.6 TX.1
NetIC2_6: IC2.6 IC7.2 | length 847.9
  Top Layer 1 w10: IC2.6 6904.84,8550.16 v1(6905,8550) ; IC7.2 7648.64,8523.64 v1(7650,8525)
  Top Layer w10: v1(6905,8550) 7625,8550 v1(7650,8525)
NetIC3_1: IC3.1 R2.2 | length 874.9
  Top Layer 1 w10: v1@6305,8315 v1(6305.24,8314.76) 6305.47,8314.53 IC3.1
  Top Layer w10: v1(6305.24,8314.76) 6460.35,8469.88 6779.88,8469.88 6925,8615 v1(6925,8625)
  Bottom Layer 1 w10: v1(6925,8625) 6989.8,8625 R2.2
NetIC3_3: IC3.3 RX.1
NetIC3_6: IC3.6 U3.5 | length 609.3
  Top Layer 1 w10: IC3.6 v1(6484.84,8275.16) v1@6485,8275 ; v1(6925,8195) 6954.84,8224.84 U3.5
  Top Layer w10: v1(6484.84,8275.16) 6565,8195 v1(6925,8195)
NetIC4_2: IC4.2 IC7.3 | length 391.1
  Top Layer 1 w10: v1(7360,8830) IC4.2 ; IC7.3 v1(7547.73,8612.27)
  Top Layer w10: v1(7360,8830) 7547.73,8642.27 v1(7547.73,8612.27)
NetIC7_1: IC7.1 U3.26 | length 440.6
  Top Layer 1 w10: U3.26 7230.34,8225 v1(7275,8225) ; v1(7420,8500) 7443.64,8523.64 IC7.1
  Top Layer w10: v1(7275,8225) 7275,8355 v1(7420,8500)
NetR4_1: R4.1 R5.2 U4.1 | length 1461.9
  Top Layer 1 w10: U4.1 5865.55,8405.55 5870,8410 v1(5880,8410)
  Bottom Layer 1 w10: R5.2 v1(4830,8125) 5785,8125 5880,8220 5880,8420 5880,8440 5860.26,8459.74 5845.93,8459.74 R4.1
RBIAS: IC2.1 R3.2 | length 404.4
  Top Layer 1 w10: v1(6479.8,8674.8) 6480,8675 6605,8675 6690.47,8589.53 IC2.1
  Bottom Layer 1 w10: R3.2 v1(6479.8,8674.8) v1@6480,8675
TX_MIX: IC2.3 U1.5 U2.19 | length 3277.7
  Top Layer 1 w10: U2.19 v1(3768,8423) ; U1.5 v1(4569.84,8350.16) ; v1(6705,8550) 6773.5,8550 IC2.3
  Top Layer w10: v1(3768,8423) 3916,8275 4494.69,8275 v1(4569.84,8350.16) 4769.69,8550 v1(6705,8550)
VCTL_RX: J1.3 U3.15 | length 1034.2
  Top Layer 1 w10: v1(6653.9,8806.1) J1.3 ; v1(7105,8060) 7105.16,8060.16 U3.15
  Bottom Layer w10: v1(6653.9,8806.1) 6653.9,8511.1 v1(7105,8060)
VCTL_TX: J2.3 U1.15 | length 438.7
  Top Layer 1 w10: J2.3 v1(4414.88,8810.12) v1@4415,8810 ; U1.15 4424.84,8649.84 4475,8700 v1(4475,8715)
  Bottom Layer w10: v1(4414.88,8810.12) 4414.88,8775.12 v1(4475,8715)
VDD: C5.1 C6.2 C7.2 C8.2 C9.1 C10.2 IC1.8 IC2.8 IC3.8 R1.1 R2.1 R3.1 R4.2 U4.2 | length 7162.7
  Top Layer 1 w10: v1(3500,8795) 3955,8795 4105.47,8644.53 ; IC1.8 4105.47,8644.53 ; v1(4114.66,8644.53) 4105.47,8644.53 ; U4.2 5775,8295 5825,8245 v1(5945,8245) ; IC3.8 v1(6436.34,8353.66) ; IC2.8 6980.47,8589.53 7000,8570 v1(7095,8570)
  Bottom Layer w10: v1(4114.66,8644.53) 4199.18,8560 4675,8560 ; v1(5945,8245) 6295,8245 6403.66,8353.66 v1(6436.34,8353.66)
  Bottom Layer 1 w10: C6.2 3451.38,8746.38 v1(3500,8795) C5.1 ; R1.1 4670.2,8580 5684.33,8580 R4.2 5804.33,8494.33 5834.59,8524.59 6265.41,8524.59 6290.24,8499.76 ; v1(6436.34,8353.66) 6331.34,8353.66 6290,8395 C8.2 6290.24,8450.24 6290.24,8499.76 ; C9.1 6573.62,8157.95 6840.67,8425 C7.2 7291.38,8427.95 7165,8554.33 C10.2 7125,8840 7095,8810 7095,8775 7095.2,8774.8 7095.2,8679.8 ; v1(7095,8570) 7095.2,8570.2 R2.1 7095.2,8679.8 ; 6290.24,8499.76 6315.47,8525 6555,8525 6580,8550 6580,8599.8 R3.1 6710,8600 6830,8720 7055,8720 7095.2,8679.8
VTUNE_FILTER_RX: J1.2 U3.19 | length 1085.8
  Top Layer 1 w10: v1(6673.58,8806.42) J1.2 ; v1(7183.9,8061.1) U3.19
  Bottom Layer w10: v1(6673.58,8806.42) 6673.58,8521.42 7133.9,8061.1 v1(7183.9,8061.1)
VTUNE_FILTER_TX: J2.2 U1.19 | length 429.5
  Top Layer 1 w10: U1.19 4346.1,8611.1 4434.57,8699.57 J2.2
VTUNE_VCO: J2.1 U2.29 | length 1034.8
  Top Layer 1 w10: U2.29 3604.46,8579.46 v1(3630,8605) ; J2.1 4455,8867.32 v1(4455,8810)
  Bottom Layer 1 w10: v1(3630,8605) 4250,8605 v1(4455,8810)
pads on no net: IC4.4 IC4.5 IC4.6 IC4.10 IC4.11 IC4.12 IC4.13 J1.7 J1.8 J1.9 J1.10 J1.11 J1.12 J2.6 J2.7 J2.8 J2.9 J2.10 J2.11 J2.12 J3.2 J3.3 J3.4 J3.5 J3.6 J3.7 J3.8 U1.1 U1.2 U1.3 U1.7 U1.8 U1.9 U1.10 U1.11 U1.14 U1.17 U1.20 U1.21 U1.22 U1.23 U1.24 U1.28 U1.29 U1.30 U1.31 U1.32 U1.33 U1.34 U1.35 U1.36 U1.37 U1.38 U1.39 U1.40 U1.41 U2.1 U2.2 U2.3 U2.4 U2.6 U2.7 U2.8 U2.9 U2.10 U2.12 U2.13 U2.14 U2.15 U2.16 U2.17 U2.18 U2.20 U2.22 U2.23 U2.24 U2.25 U2.26 U2.27 U2.28 U2.30 U2.31 U2.32 U3.1 U3.2 U3.3 U3.7 U3.8 U3.9 U3.10 U3.11 U3.14 U3.17 U3.20 U3.21 U3.22 U3.23 U3.24 U3.28 U3.29 U3.30 U3.31 U3.32 U3.33 U3.34 U3.35 U3.36 U3.37 U3.38 U3.39 U3.40 U3.41 U4.4

## Polygon pours and split planes (outlines as drawn)
GND_TX_RF on Top Layer 1 "GND_TX_RF_L01_P002" (solid, pour order 2): 3105,9050 5460,9050 5460,8045 3105,8045
GND_RX_RF on Top Layer 1 "GND_RX_RF_L01_P001" (solid, pour order 1): 5470,9050 7830,9050 7830,8045 5470,8045
GND_TX_RF on Bottom Layer "GND_TX_RF_L03_P004" (solid, pour order 4): 3105,9050 5460,9050 5460,8045 3105,8045
GND_RX_RF on Bottom Layer "GND_RX_RF_L03_P003" (solid, pour order 3): 5470,9050 7829.41,9050 7829.41,8045 5470,8045
+5 on Bottom Layer 1 "+5_L04_P000" (solid, pour order 0): 3105,9050 7830,9050 7830,8045 3105,8045
GND_RX_RF on Top Layer "NONET_L-01_P-001" (solid, pour order 6): 6465,7825 7830,7825 7830,4105 6465,4105
GND_TX_RF on Top Layer "NONET_L-01_P-001" (solid, pour order 5): 3105,7825 4470,7825 4470,4105 3105,4105

## Silkscreen, mask and mechanical layers (free items; w line width, h text height)
Top Overlay:
  text "TX" at 3190.7,9171.82 h60
  text "RX" at 7635,9135 h60